# Altium PCB KUOZHAN.PCBDOC (part 16 of 21)
Units mm, origin at the board's own origin, x right, y up, seen from the top; angles counter-clockwise.
Board outline 165.51 x 116.38 mm, 2 copper layers (Top Layer, Bottom Layer); 171 components, 245 nets, 894 pads, 298 vias.
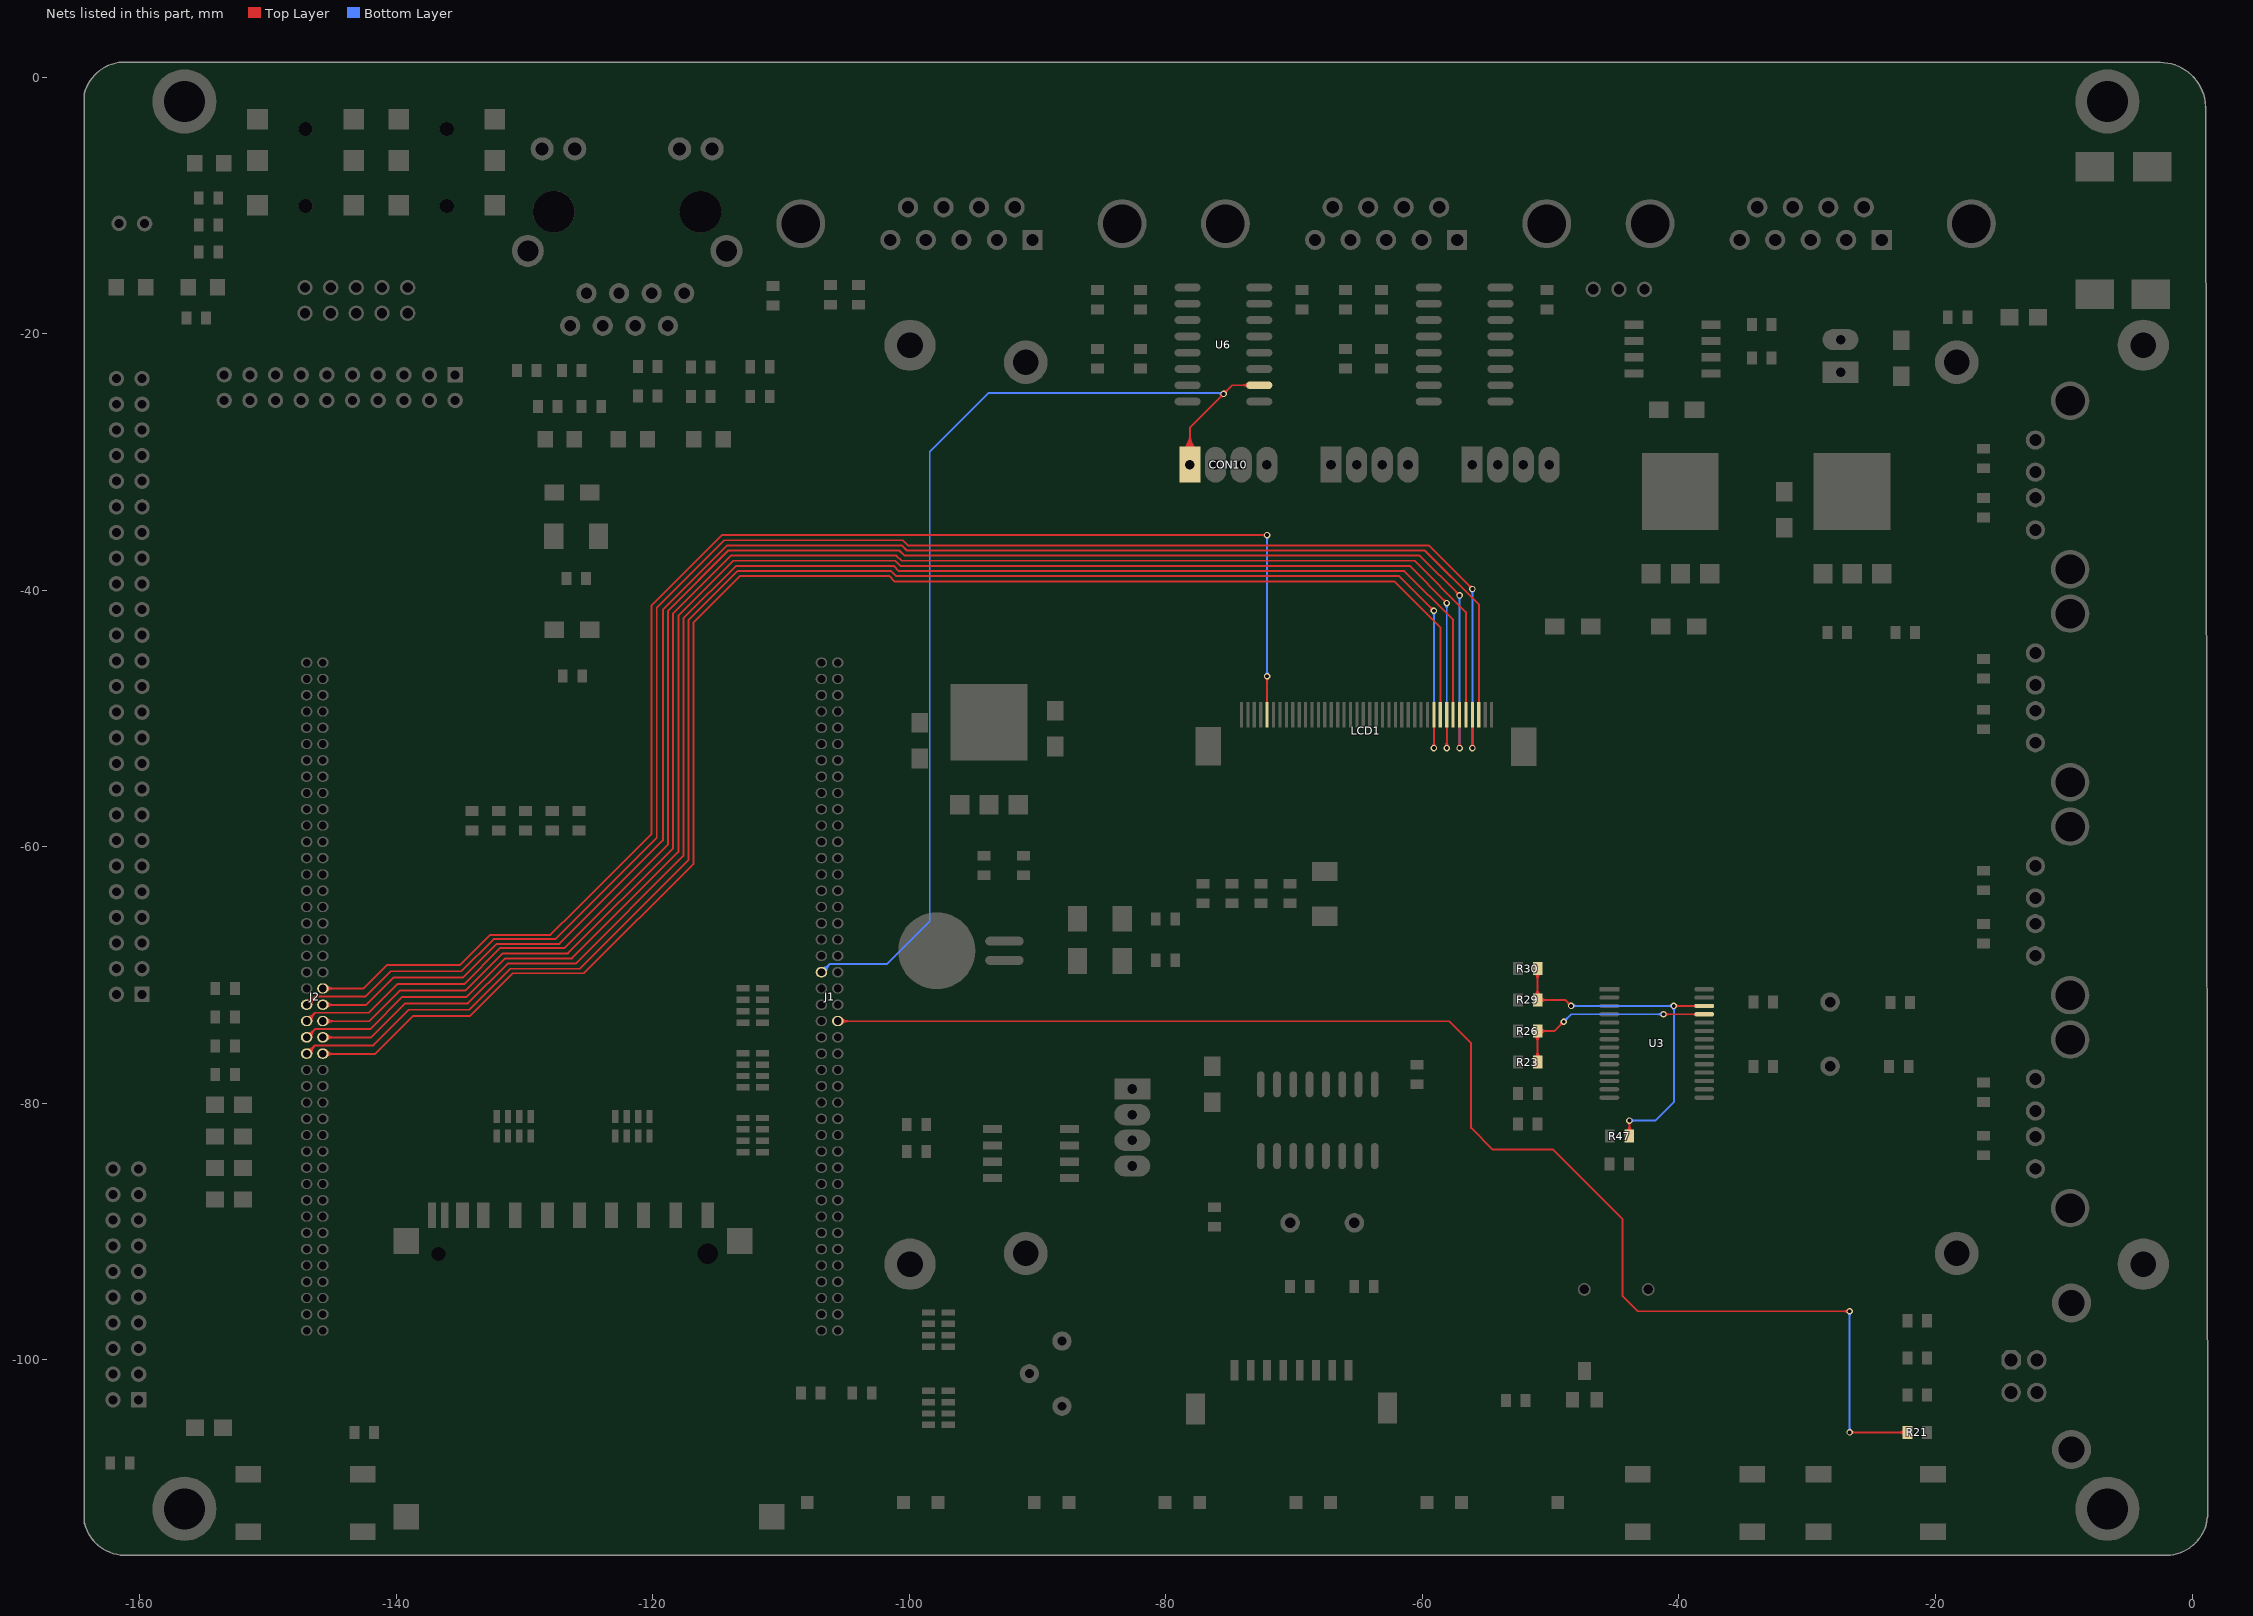
[diagram p16: the nets of this part, all layers, seen from the top]

## Via types
v1: diameter 0.5, hole 0.3, Top Layer to Bottom Layer, 272 vias
v2: diameter 0.6, hole 0.3, Top Layer to Bottom Layer, 24 vias
v3: diameter 0.9, hole 0.9, Top Layer to Bottom Layer, 2 vias

## Nets (pads, with @x,y where several pads share a name; then routed paths per layer and width w, separated by ;. In a path a pad name is that pad's centre, name@x,y a point inside that pad or via, vN(x,y) a via of type N, cw(c..) or ccw(c..) an arc to the next point about the centre after c; other vN are vias at no path point) (continued)
TXD2: CON10.1 J1.39 U6.10 | length 143.2
  Top Layer w0.15: CON10.1@-78.122,-30.21 -78.122,-27.322 v1(-75.488,-24.688) -74.82,-24.02 U6.10@-72.712,-24.02 ; v1@-75.613,-24.688 cw(c-75.914,-24.688) -75.701,-24.901 cw(c-75.488,-25.114) v1@-75.488,-24.813 ; v1@-75.488,-24.563 ccw(c-75.488,-24.261) -75.274,-24.474 ccw(c-75.061,-24.688) v1@-75.363,-24.688 ; CON10.1@-78.652,-29.104 ccw(c-79.934,-27.823) -78.122,-27.823 ; CON10.1@-78.652,-29.104 ccw(c-79.934,-27.823) -78.122,-27.823 ; CON10.1@-78.652,-29.104 ccw(c-79.934,-27.823) -78.122,-27.823 ; CON10.1@-78.652,-29.104 ccw(c-79.934,-27.823) -78.122,-27.823 ; CON10.1@-78.652,-29.104 ccw(c-79.934,-27.823) -78.122,-27.823 ; CON10.1@-78.546,-29.21 ccw(c-79.572,-28.185) -78.122,-28.185 ; CON10.1@-78.546,-29.21 ccw(c-79.572,-28.185) -78.122,-28.185 ; CON10.1@-78.546,-29.21 ccw(c-79.572,-28.185) -78.122,-28.185 ; CON10.1@-78.546,-29.21 ccw(c-79.572,-28.185) -78.122,-28.185 ; CON10.1@-78.546,-29.21 ccw(c-79.572,-28.185) -78.122,-28.185 ; CON10.1@-78.44,-29.317 ccw(c-79.209,-28.547) -78.122,-28.547 ; CON10.1@-78.44,-29.317 ccw(c-79.209,-28.547) -78.122,-28.547 ; CON10.1@-78.44,-29.317 ccw(c-79.209,-28.547) -78.122,-28.547 ; CON10.1@-78.44,-29.317 ccw(c-79.209,-28.547) -78.122,-28.547 ; CON10.1@-78.44,-29.317 ccw(c-79.209,-28.547) -78.122,-28.547 ; -78.122,-28.547 ccw(c-77.034,-28.547) CON10.1@-77.803,-29.317 ; -78.122,-28.547 ccw(c-77.034,-28.547) CON10.1@-77.803,-29.317 ; -78.122,-28.547 ccw(c-77.034,-28.547) CON10.1@-77.803,-29.317 ; -78.122,-28.547 ccw(c-77.034,-28.547) CON10.1@-77.803,-29.317 ; -78.122,-28.547 ccw(c-77.034,-28.547) CON10.1@-77.803,-29.317 ; -78.122,-28.185 ccw(c-76.672,-28.185) CON10.1@-77.697,-29.21 ; -78.122,-28.185 ccw(c-76.672,-28.185) CON10.1@-77.697,-29.21 ; -78.122,-28.185 ccw(c-76.672,-28.185) CON10.1@-77.697,-29.21 ; -78.122,-28.185 ccw(c-76.672,-28.185) CON10.1@-77.697,-29.21 ; -78.122,-28.185 ccw(c-76.672,-28.185) CON10.1@-77.697,-29.21 ; -78.122,-27.823 ccw(c-76.31,-27.823) CON10.1@-77.591,-29.104 ; -78.122,-27.823 ccw(c-76.31,-27.823) CON10.1@-77.591,-29.104 ; -78.122,-27.823 ccw(c-76.31,-27.823) CON10.1@-77.591,-29.104 ; -78.122,-27.823 ccw(c-76.31,-27.823) CON10.1@-77.591,-29.104 ; -78.122,-27.823 ccw(c-76.31,-27.823) CON10.1@-77.591,-29.104 ; -75.786,-24.986 cw(c-75.488,-25.285) v1@-75.488,-24.863 ; -75.786,-24.986 ccw(c-76.085,-24.688) v1@-75.663,-24.688 ; -75.786,-24.986 cw(c-75.488,-25.285) v1@-75.488,-24.863 ; -75.786,-24.986 ccw(c-76.085,-24.688) v1@-75.663,-24.688 ; -75.786,-24.986 cw(c-75.488,-25.285) v1@-75.488,-24.863 ; -75.786,-24.986 ccw(c-76.085,-24.688) v1@-75.663,-24.688 ; -75.786,-24.986 ccw(c-76.085,-24.688) v1@-75.663,-24.688 ; -75.786,-24.986 cw(c-75.488,-25.285) v1@-75.488,-24.863 ; v1@-75.488,-24.513 ccw(c-75.488,-24.09) -75.189,-24.389 ; v1@-75.488,-24.513 ccw(c-75.488,-24.09) -75.189,-24.389 ; v1@-75.488,-24.513 ccw(c-75.488,-24.09) -75.189,-24.389 ; v1@-75.488,-24.513 ccw(c-75.488,-24.09) -75.189,-24.389 ; v1@-75.313,-24.688 cw(c-74.89,-24.688) -75.189,-24.389 ; v1@-75.313,-24.688 cw(c-74.89,-24.688) -75.189,-24.389 ; v1@-75.313,-24.688 cw(c-74.89,-24.688) -75.189,-24.389 ; v1@-75.313,-24.688 cw(c-74.89,-24.688) -75.189,-24.389 ; -73.978,-24.02 cw(c-73.978,-24.575) U6.10@-73.586,-24.182 ; -73.978,-24.02 ccw(c-73.978,-23.465) U6.10@-73.586,-23.858 ; -73.978,-24.02 cw(c-73.978,-24.575) U6.10@-73.586,-24.182 ; -73.978,-24.02 ccw(c-73.978,-23.465) U6.10@-73.586,-23.858 ; -73.978,-24.02 cw(c-73.978,-24.575) U6.10@-73.586,-24.182 ; -73.978,-24.02 ccw(c-73.978,-23.465) U6.10@-73.586,-23.858 ; -73.978,-24.02 cw(c-73.978,-24.575) U6.10@-73.586,-24.182 ; -73.978,-24.02 ccw(c-73.978,-23.465) U6.10@-73.586,-23.858 ; -73.978,-24.02 ccw(c-73.978,-23.465) U6.10@-73.586,-23.858 ; -73.978,-24.02 cw(c-73.978,-24.575) U6.10@-73.586,-24.182
  Bottom Layer w0.15: J1.39@-106.841,-69.785 -106.216,-69.16 ; J1.39@-106.841,-69.769 -106.196,-69.124 -101.724,-69.124 -98.4,-65.8 -98.4,-29.2 -93.812,-24.612 v1@-75.412,-24.612 ; -75.973,-24.612 cw(c-75.973,-25.173) v1@-75.576,-24.776 ; J1.39@-106.841,-69.61 ccw(c-106.841,-69.188) J1.39@-106.542,-69.486 ; J1.39@-106.841,-69.61 ccw(c-106.841,-69.188) J1.39@-106.542,-69.486 ; J1.39@-106.841,-69.61 ccw(c-106.841,-69.188) J1.39@-106.542,-69.486 ; J1.39@-106.841,-69.46 ccw(c-106.841,-68.675) -106.286,-69.23 ; J1.39@-106.841,-69.46 ccw(c-106.841,-68.675) -106.286,-69.23 ; J1.39@-106.841,-69.46 ccw(c-106.841,-68.675) -106.286,-69.23 ; J1.39@-106.791,-69.444 ccw(c-106.791,-68.78) -106.321,-69.25 cw(c-106.791,-68.78) J1.39@-106.791,-69.444 ; J1.39@-106.791,-69.444 ccw(c-106.791,-68.742) -106.294,-69.239 cw(c-106.791,-68.742) J1.39@-106.791,-69.444 ; J1.39@-106.666,-69.785 cw(c-106.243,-69.785) J1.39@-106.542,-69.486 ; J1.39@-106.666,-69.785 cw(c-106.243,-69.785) J1.39@-106.542,-69.486 ; J1.39@-106.666,-69.785 cw(c-106.243,-69.785) J1.39@-106.542,-69.486 ; J1.39@-106.616,-69.769 cw(c-106.073,-69.769) -106.457,-69.385 ccw(c-106.073,-69.769) J1.39@-106.616,-69.769 ; J1.39@-106.616,-69.768 cw(c-106.119,-69.766) -106.47,-69.414 ccw(c-106.119,-69.766) J1.39@-106.616,-69.768 ; J1.39@-106.516,-69.785 cw(c-105.731,-69.785) -106.286,-69.23 ; J1.39@-106.516,-69.785 cw(c-105.731,-69.785) -106.286,-69.23 ; J1.39@-106.516,-69.785 cw(c-105.731,-69.785) -106.286,-69.23 ; -106.216,-69.16 ccw(c-105.612,-69.764) -106.466,-69.768 cw(c-105.612,-69.764) -106.216,-69.16 ; -76.094,-24.612 cw(c-76.094,-25.294) v1@-75.611,-24.811 ; -76.094,-24.612 cw(c-76.094,-25.294) v1@-75.611,-24.811 ; -76.094,-24.612 cw(c-76.094,-25.294) v1@-75.611,-24.811 ; -76.094,-24.612 cw(c-76.094,-25.294) v1@-75.611,-24.811 ; -75.732,-24.612 cw(c-75.732,-24.932) v1@-75.505,-24.705 ; -75.732,-24.612 cw(c-75.732,-24.932) v1@-75.505,-24.705 ; -75.732,-24.612 cw(c-75.732,-24.932) v1@-75.505,-24.705 ; -75.732,-24.612 cw(c-75.732,-24.932) v1@-75.505,-24.705 ; -75.726,-24.612 ccw(c-75.726,-24.449) v1@-75.611,-24.564 ; -75.726,-24.612 ccw(c-75.726,-24.449) v1@-75.611,-24.564 ; -75.726,-24.612 ccw(c-75.726,-24.449) v1@-75.611,-24.564 ; -75.726,-24.612 ccw(c-75.726,-24.449) v1@-75.611,-24.564 ; J1.39@-106.466,-69.769 cw(c-105.56,-69.769) -106.201,-69.129 ccw(c-105.56,-69.769) J1.39@-106.466,-69.769
USB_EN: J1.46 R21.1 | length 136.8
  Top Layer w0.15: J1.46@-105.571,-73.598 -64.702,-73.598 -57.902,-73.598 -56.2,-75.3 -56.2,-81.9 -54.5,-83.6 -49.8,-83.6 -44.4,-89 -44.4,-95 -43.2,-96.2 v1(-26.7,-96.2) ; v1@-26.788,-96.288 ccw(c-27.002,-96.502) -27.002,-96.2 ccw(c-27.002,-95.898) v1@-26.788,-96.112 ; v1(-26.7,-105.64) R21.1@-22.187,-105.64 ; v1@-26.612,-105.729 cw(c-26.398,-105.942) -26.398,-105.64 cw(c-26.398,-105.339) v1@-26.612,-105.552 ; J1.46@-105.447,-73.721 cw(c-105.148,-74.02) J1.46@-105.148,-73.598 ; J1.46@-105.447,-73.721 cw(c-105.148,-74.02) J1.46@-105.148,-73.598 ; J1.46@-105.447,-73.721 cw(c-105.148,-74.02) J1.46@-105.148,-73.598 ; J1.46@-105.447,-73.474 ccw(c-105.148,-73.175) J1.46@-105.148,-73.598 ; J1.46@-105.447,-73.474 ccw(c-105.148,-73.175) J1.46@-105.148,-73.598 ; J1.46@-105.447,-73.474 ccw(c-105.148,-73.175) J1.46@-105.148,-73.598 ; J1.46@-105.341,-73.828 cw(c-104.786,-74.382) -104.786,-73.598 ; J1.46@-105.341,-73.828 cw(c-104.786,-74.382) -104.786,-73.598 ; J1.46@-105.341,-73.828 cw(c-104.786,-74.382) -104.786,-73.598 ; J1.46@-105.341,-73.368 ccw(c-104.786,-72.813) -104.786,-73.598 ; J1.46@-105.341,-73.368 ccw(c-104.786,-72.813) -104.786,-73.598 ; J1.46@-105.341,-73.368 ccw(c-104.786,-72.813) -104.786,-73.598 ; -27.122,-96.2 cw(c-27.122,-96.622) v1@-26.824,-96.324 ; -27.122,-96.2 ccw(c-27.122,-95.778) v1@-26.824,-96.076 ; -27.122,-96.2 cw(c-27.122,-96.622) v1@-26.824,-96.324 ; -27.122,-96.2 ccw(c-27.122,-95.778) v1@-26.824,-96.076 ; -27.122,-96.2 cw(c-27.122,-96.622) v1@-26.824,-96.324 ; -27.122,-96.2 ccw(c-27.122,-95.778) v1@-26.824,-96.076 ; -27.122,-96.2 ccw(c-27.122,-95.778) v1@-26.824,-96.076 ; -27.122,-96.2 cw(c-27.122,-96.622) v1@-26.824,-96.324 ; v1@-26.576,-105.764 cw(c-26.278,-106.063) -26.278,-105.64 ; v1@-26.576,-105.764 cw(c-26.278,-106.063) -26.278,-105.64 ; v1@-26.576,-105.764 cw(c-26.278,-106.063) -26.278,-105.64 ; v1@-26.576,-105.764 cw(c-26.278,-106.063) -26.278,-105.64 ; v1@-26.576,-105.517 ccw(c-26.278,-105.218) -26.278,-105.64 ; v1@-26.576,-105.517 ccw(c-26.278,-105.218) -26.278,-105.64 ; v1@-26.576,-105.517 ccw(c-26.278,-105.218) -26.278,-105.64 ; v1@-26.576,-105.517 ccw(c-26.278,-105.218) -26.278,-105.64 ; -22.926,-105.64 cw(c-22.926,-106.379) R21.1@-22.404,-105.857 ; -22.926,-105.64 ccw(c-22.926,-104.902) R21.1@-22.404,-105.424 ; -22.926,-105.64 cw(c-22.926,-106.379) R21.1@-22.404,-105.857 ; -22.926,-105.64 ccw(c-22.926,-104.902) R21.1@-22.404,-105.424 ; -22.926,-105.64 cw(c-22.926,-106.379) R21.1@-22.404,-105.857 ; -22.926,-105.64 ccw(c-22.926,-104.902) R21.1@-22.404,-105.424 ; -22.926,-105.64 cw(c-22.926,-106.379) R21.1@-22.404,-105.857 ; -22.926,-105.64 ccw(c-22.926,-104.902) R21.1@-22.404,-105.424 ; -22.926,-105.64 ccw(c-22.926,-104.902) R21.1@-22.404,-105.424 ; -22.926,-105.64 cw(c-22.926,-106.379) R21.1@-22.404,-105.857 ; J1.46@-105.397,-73.456 ccw(c-105.054,-73.112) -105.054,-73.598 cw(c-105.054,-73.112) J1.46@-105.397,-73.456 ; J1.46@-105.291,-73.809 cw(c-104.781,-74.32) -104.781,-73.598 ccw(c-104.781,-74.32) J1.46@-105.291,-73.809 ; J1.46@-105.291,-73.35 ccw(c-104.692,-72.75) -104.692,-73.598 cw(c-104.692,-72.75) J1.46@-105.291,-73.35
  Bottom Layer w0.15: v1@-26.788,-105.552 ccw(c-27.002,-105.339) -26.7,-105.339 ccw(c-26.398,-105.339) v1@-26.612,-105.552 ; v1@-26.788,-96.288 cw(c-27.002,-96.502) -26.7,-96.502 cw(c-26.398,-96.502) v1@-26.612,-96.288 ; v1(-26.7,-105.64) v1(-26.7,-96.2) ; v1@-26.824,-105.517 ccw(c-27.122,-105.218) -26.7,-105.218 ; v1@-26.824,-105.517 ccw(c-27.122,-105.218) -26.7,-105.218 ; v1@-26.824,-105.517 ccw(c-27.122,-105.218) -26.7,-105.218 ; v1@-26.824,-105.517 ccw(c-27.122,-105.218) -26.7,-105.218 ; v1@-26.824,-96.324 cw(c-27.122,-96.622) -26.7,-96.622 ; v1@-26.824,-96.324 cw(c-27.122,-96.622) -26.7,-96.622 ; v1@-26.824,-96.324 cw(c-27.122,-96.622) -26.7,-96.622 ; v1@-26.824,-96.324 cw(c-27.122,-96.622) -26.7,-96.622 ; -26.7,-105.218 ccw(c-26.278,-105.218) v1@-26.576,-105.517 ; -26.7,-105.218 ccw(c-26.278,-105.218) v1@-26.576,-105.517 ; -26.7,-105.218 ccw(c-26.278,-105.218) v1@-26.576,-105.517 ; -26.7,-105.218 ccw(c-26.278,-105.218) v1@-26.576,-105.517 ; -26.7,-96.622 cw(c-26.278,-96.622) v1@-26.576,-96.324 ; -26.7,-96.622 cw(c-26.278,-96.622) v1@-26.576,-96.324 ; -26.7,-96.622 cw(c-26.278,-96.622) v1@-26.576,-96.324 ; -26.7,-96.622 cw(c-26.278,-96.622) v1@-26.576,-96.324
USBHUB_D+: R29.1 R30.1 R47.2 U3.26 | length 75.1
  Top Layer w0.15: R30.1@-51.013,-69.5 R29.1@-51.013,-71.928 -48.872,-71.928 v1(-48.4,-72.4) ; v1@-48.525,-72.4 ccw(c-48.827,-72.4) -48.613,-72.187 ccw(c-48.4,-71.973) v1@-48.4,-72.275 ; v1@-43.952,-81.425 cw(c-44.165,-81.638) -43.863,-81.638 cw(c-43.562,-81.638) v1@-43.775,-81.425 ; R47.2@-43.863,-82.54 v1(-43.863,-81.337) ; v1(-40.4,-72.4) U3.26@-38.1,-72.4 ; v1@-40.312,-72.488 cw(c-40.098,-72.702) -40.098,-72.4 cw(c-40.098,-72.098) v1@-40.312,-72.312 ; U3.26@-38.704,-72.464 ccw(c-38.857,-72.617) -38.857,-72.4 ccw(c-38.857,-72.183) U3.26@-38.704,-72.336 ; U3.26@-38.699,-72.464 ccw(c-38.852,-72.617) -38.852,-72.4 ccw(c-38.852,-72.183) U3.26@-38.699,-72.336 ; R29.1@-51.229,-71.585 ccw(c-51.751,-71.063) -51.013,-71.063 ; R29.1@-51.229,-71.585 ccw(c-51.751,-71.063) -51.013,-71.063 ; R29.1@-51.229,-71.585 ccw(c-51.751,-71.063) -51.013,-71.063 ; R29.1@-51.229,-71.585 ccw(c-51.751,-71.063) -51.013,-71.063 ; R29.1@-51.229,-71.585 ccw(c-51.751,-71.063) -51.013,-71.063 ; R30.1@-51.229,-69.843 cw(c-51.751,-70.366) -51.013,-70.366 ; R30.1@-51.229,-69.843 cw(c-51.751,-70.366) -51.013,-70.366 ; R30.1@-51.229,-69.843 cw(c-51.751,-70.366) -51.013,-70.366 ; R30.1@-51.229,-69.843 cw(c-51.751,-70.366) -51.013,-70.366 ; R30.1@-51.229,-69.843 cw(c-51.751,-70.366) -51.013,-70.366 ; -51.013,-71.063 ccw(c-50.274,-71.063) R29.1@-50.796,-71.585 ; -51.013,-71.063 ccw(c-50.274,-71.063) R29.1@-50.796,-71.585 ; -51.013,-71.063 ccw(c-50.274,-71.063) R29.1@-50.796,-71.585 ; -51.013,-71.063 ccw(c-50.274,-71.063) R29.1@-50.796,-71.585 ; -51.013,-71.063 ccw(c-50.274,-71.063) R29.1@-50.796,-71.585 ; -51.013,-70.366 cw(c-50.274,-70.366) R30.1@-50.796,-69.843 ; -51.013,-70.366 cw(c-50.274,-70.366) R30.1@-50.796,-69.843 ; -51.013,-70.366 cw(c-50.274,-70.366) R30.1@-50.796,-69.843 ; -51.013,-70.366 cw(c-50.274,-70.366) R30.1@-50.796,-69.843 ; -51.013,-70.366 cw(c-50.274,-70.366) R30.1@-50.796,-69.843 ; R29.1@-50.796,-72.145 cw(c-50.274,-72.667) -50.274,-71.928 ; R29.1@-50.796,-72.145 cw(c-50.274,-72.667) -50.274,-71.928 ; R29.1@-50.796,-72.145 cw(c-50.274,-72.667) -50.274,-71.928 ; R29.1@-50.796,-72.145 cw(c-50.274,-72.667) -50.274,-71.928 ; R29.1@-50.796,-72.145 cw(c-50.274,-72.667) -50.274,-71.928 ; R29.1@-50.796,-71.712 ccw(c-50.274,-71.19) -50.274,-71.928 ; R29.1@-50.796,-71.712 ccw(c-50.274,-71.19) -50.274,-71.928 ; R29.1@-50.796,-71.712 ccw(c-50.274,-71.19) -50.274,-71.928 ; R29.1@-50.796,-71.712 ccw(c-50.274,-71.19) -50.274,-71.928 ; R29.1@-50.796,-71.712 ccw(c-50.274,-71.19) -50.274,-71.928 ; -48.699,-72.101 cw(c-48.997,-72.4) v1@-48.575,-72.4 ; -48.699,-72.101 ccw(c-48.4,-71.803) v1@-48.4,-72.225 ; -48.699,-72.101 cw(c-48.997,-72.4) v1@-48.575,-72.4 ; -48.699,-72.101 ccw(c-48.4,-71.803) v1@-48.4,-72.225 ; -48.699,-72.101 cw(c-48.997,-72.4) v1@-48.575,-72.4 ; -48.699,-72.101 ccw(c-48.4,-71.803) v1@-48.4,-72.225 ; -48.699,-72.101 ccw(c-48.4,-71.803) v1@-48.4,-72.225 ; -48.699,-72.101 cw(c-48.997,-72.4) v1@-48.575,-72.4 ; R47.2@-44.08,-82.197 ccw(c-44.602,-81.675) -43.863,-81.675 ; R47.2@-44.08,-82.197 ccw(c-44.602,-81.675) -43.863,-81.675 ; R47.2@-44.08,-82.197 ccw(c-44.602,-81.675) -43.863,-81.675 ; R47.2@-44.08,-82.197 ccw(c-44.602,-81.675) -43.863,-81.675 ; R47.2@-44.08,-82.197 ccw(c-44.602,-81.675) -43.863,-81.675 ; v1@-43.987,-81.46 cw(c-44.286,-81.759) -43.863,-81.759 ; v1@-43.987,-81.46 cw(c-44.286,-81.759) -43.863,-81.759 ; v1@-43.987,-81.46 cw(c-44.286,-81.759) -43.863,-81.759 ; v1@-43.987,-81.46 cw(c-44.286,-81.759) -43.863,-81.759 ; -43.863,-81.759 cw(c-43.441,-81.759) v1@-43.74,-81.46 ; -43.863,-81.759 cw(c-43.441,-81.759) v1@-43.74,-81.46 ; -43.863,-81.759 cw(c-43.441,-81.759) v1@-43.74,-81.46 ; -43.863,-81.759 cw(c-43.441,-81.759) v1@-43.74,-81.46 ; -43.863,-81.675 ccw(c-43.125,-81.675) R47.2@-43.647,-82.197 ; -43.863,-81.675 ccw(c-43.125,-81.675) R47.2@-43.647,-82.197 ; -43.863,-81.675 ccw(c-43.125,-81.675) R47.2@-43.647,-82.197 ; -43.863,-81.675 ccw(c-43.125,-81.675) R47.2@-43.647,-82.197 ; -43.863,-81.675 ccw(c-43.125,-81.675) R47.2@-43.647,-82.197 ; v1@-40.276,-72.524 cw(c-39.978,-72.822) -39.978,-72.4 ; v1@-40.276,-72.524 cw(c-39.978,-72.822) -39.978,-72.4 ; v1@-40.276,-72.524 cw(c-39.978,-72.822) -39.978,-72.4 ; v1@-40.276,-72.524 cw(c-39.978,-72.822) -39.978,-72.4 ; v1@-40.276,-72.276 ccw(c-39.978,-71.978) -39.978,-72.4 ; v1@-40.276,-72.276 ccw(c-39.978,-71.978) -39.978,-72.4 ; v1@-40.276,-72.276 ccw(c-39.978,-71.978) -39.978,-72.4 ; v1@-40.276,-72.276 ccw(c-39.978,-71.978) -39.978,-72.4 ; -38.802,-72.4 cw(c-38.802,-72.617) U3.26@-38.649,-72.464 ; -38.802,-72.4 ccw(c-38.802,-72.183) U3.26@-38.649,-72.336 ; -38.802,-72.4 cw(c-38.802,-72.617) U3.26@-38.649,-72.464 ; -38.802,-72.4 ccw(c-38.802,-72.183) U3.26@-38.649,-72.336 ; -38.802,-72.4 cw(c-38.802,-72.617) U3.26@-38.649,-72.464 ; -38.802,-72.4 ccw(c-38.802,-72.183) U3.26@-38.649,-72.336
  Bottom Layer w0.15: v1(-48.4,-72.4) v1(-40.4,-72.4) -40.4,-79.9 -41.837,-81.337 v1(-43.863,-81.337) ; v1@-48.312,-72.488 cw(c-48.098,-72.702) -48.098,-72.4 cw(c-48.098,-72.098) v1@-48.312,-72.312 ; v1@-43.775,-81.425 cw(c-43.562,-81.638) -43.562,-81.337 cw(c-43.562,-81.035) v1@-43.775,-81.248 ; v1@-40.488,-72.312 cw(c-40.702,-72.098) -40.702,-72.4 cw(c-40.702,-72.702) -40.488,-72.488 cw(c-40.702,-72.702) -40.4,-72.702 cw(c-40.098,-72.702) v1@-40.312,-72.488 ; v1@-48.276,-72.524 cw(c-47.978,-72.822) -47.978,-72.4 ; v1@-48.276,-72.524 cw(c-47.978,-72.822) -47.978,-72.4 ; v1@-48.276,-72.524 cw(c-47.978,-72.822) -47.978,-72.4 ; v1@-48.276,-72.524 cw(c-47.978,-72.822) -47.978,-72.4 ; v1@-48.276,-72.276 ccw(c-47.978,-71.978) -47.978,-72.4 ; v1@-48.276,-72.276 ccw(c-47.978,-71.978) -47.978,-72.4 ; v1@-48.276,-72.276 ccw(c-47.978,-71.978) -47.978,-72.4 ; v1@-48.276,-72.276 ccw(c-47.978,-71.978) -47.978,-72.4 ; v1@-43.74,-81.46 cw(c-43.441,-81.759) -43.441,-81.337 ; v1@-43.74,-81.46 cw(c-43.441,-81.759) -43.441,-81.337 ; v1@-43.74,-81.46 cw(c-43.441,-81.759) -43.441,-81.337 ; v1@-43.74,-81.46 cw(c-43.441,-81.759) -43.441,-81.337 ; v1@-43.74,-81.213 ccw(c-43.441,-80.914) -43.441,-81.337 ; v1@-43.74,-81.213 ccw(c-43.441,-80.914) -43.441,-81.337 ; v1@-43.74,-81.213 ccw(c-43.441,-80.914) -43.441,-81.337 ; v1@-43.74,-81.213 ccw(c-43.441,-80.914) -43.441,-81.337 ; -40.822,-72.4 cw(c-40.822,-72.822) v1@-40.524,-72.524 ; -40.822,-72.4 ccw(c-40.822,-71.978) v1@-40.524,-72.276 ; -40.822,-72.4 cw(c-40.822,-72.822) v1@-40.524,-72.524 ; -40.822,-72.4 ccw(c-40.822,-71.978) v1@-40.524,-72.276 ; -40.822,-72.4 cw(c-40.822,-72.822) v1@-40.524,-72.524 ; -40.822,-72.4 ccw(c-40.822,-71.978) v1@-40.524,-72.276 ; -40.822,-72.4 ccw(c-40.822,-71.978) v1@-40.524,-72.276 ; -40.822,-72.4 cw(c-40.822,-72.822) v1@-40.524,-72.524 ; v1@-40.524,-72.524 cw(c-40.822,-72.822) -40.4,-72.822 ; v1@-40.524,-72.524 cw(c-40.822,-72.822) -40.4,-72.822 ; v1@-40.524,-72.524 cw(c-40.822,-72.822) -40.4,-72.822 ; v1@-40.524,-72.524 cw(c-40.822,-72.822) -40.4,-72.822 ; -40.4,-72.822 cw(c-39.978,-72.822) v1@-40.276,-72.524 ; -40.4,-72.822 cw(c-39.978,-72.822) v1@-40.276,-72.524 ; -40.4,-72.822 cw(c-39.978,-72.822) v1@-40.276,-72.524 ; -40.4,-72.822 cw(c-39.978,-72.822) v1@-40.276,-72.524
USBHUB_D-: R23.1 R26.1 U3.25 | length 47.5
  Top Layer w0.15: R23.1@-51.013,-76.785 R26.1@-51.013,-74.357 -49.707,-74.357 v1(-48.983,-73.633) ; v1@-49.108,-73.633 cw(c-49.41,-73.633) -49.197,-73.847 cw(c-48.983,-74.06) v1@-48.983,-73.758 ; v1(-41.2,-73.05) U3.25@-38.1,-73.05 ; v1@-41.112,-73.138 cw(c-40.898,-73.352) -40.898,-73.05 cw(c-40.898,-72.748) v1@-41.112,-72.962 ; U3.25@-38.704,-73.114 ccw(c-38.857,-73.267) -38.857,-73.05 ccw(c-38.857,-72.833) U3.25@-38.704,-72.986 ; U3.25@-38.699,-73.114 ccw(c-38.852,-73.267) -38.852,-73.05 ccw(c-38.852,-72.833) U3.25@-38.699,-72.986 ; R23.1@-51.229,-76.441 ccw(c-51.751,-75.919) -51.013,-75.919 ; R23.1@-51.229,-76.441 ccw(c-51.751,-75.919) -51.013,-75.919 ; R23.1@-51.229,-76.441 ccw(c-51.751,-75.919) -51.013,-75.919 ; R23.1@-51.229,-76.441 ccw(c-51.751,-75.919) -51.013,-75.919 ; R23.1@-51.229,-76.441 ccw(c-51.751,-75.919) -51.013,-75.919 ; R26.1@-51.229,-74.7 cw(c-51.751,-75.222) -51.013,-75.222 ; R26.1@-51.229,-74.7 cw(c-51.751,-75.222) -51.013,-75.222 ; R26.1@-51.229,-74.7 cw(c-51.751,-75.222) -51.013,-75.222 ; R26.1@-51.229,-74.7 cw(c-51.751,-75.222) -51.013,-75.222 ; R26.1@-51.229,-74.7 cw(c-51.751,-75.222) -51.013,-75.222 ; -51.013,-75.919 ccw(c-50.274,-75.919) R23.1@-50.796,-76.441 ; -51.013,-75.919 ccw(c-50.274,-75.919) R23.1@-50.796,-76.441 ; -51.013,-75.919 ccw(c-50.274,-75.919) R23.1@-50.796,-76.441 ; -51.013,-75.919 ccw(c-50.274,-75.919) R23.1@-50.796,-76.441 ; -51.013,-75.919 ccw(c-50.274,-75.919) R23.1@-50.796,-76.441 ; -51.013,-75.222 cw(c-50.274,-75.222) R26.1@-50.796,-74.7 ; -51.013,-75.222 cw(c-50.274,-75.222) R26.1@-50.796,-74.7 ; -51.013,-75.222 cw(c-50.274,-75.222) R26.1@-50.796,-74.7 ; -51.013,-75.222 cw(c-50.274,-75.222) R26.1@-50.796,-74.7 ; -51.013,-75.222 cw(c-50.274,-75.222) R26.1@-50.796,-74.7 ; R26.1@-50.796,-74.573 cw(c-50.274,-75.095) -50.274,-74.357 ; R26.1@-50.796,-74.573 cw(c-50.274,-75.095) -50.274,-74.357 ; R26.1@-50.796,-74.573 cw(c-50.274,-75.095) -50.274,-74.357 ; R26.1@-50.796,-74.573 cw(c-50.274,-75.095) -50.274,-74.357 ; R26.1@-50.796,-74.573 cw(c-50.274,-75.095) -50.274,-74.357 ; R26.1@-50.796,-74.14 ccw(c-50.274,-73.618) -50.274,-74.357 ; R26.1@-50.796,-74.14 ccw(c-50.274,-73.618) -50.274,-74.357 ; R26.1@-50.796,-74.14 ccw(c-50.274,-73.618) -50.274,-74.357 ; R26.1@-50.796,-74.14 ccw(c-50.274,-73.618) -50.274,-74.357 ; R26.1@-50.796,-74.14 ccw(c-50.274,-73.618) -50.274,-74.357 ; -49.282,-73.932 cw(c-48.983,-74.231) v1@-48.983,-73.808 ; -49.282,-73.932 ccw(c-49.581,-73.633) v1@-49.158,-73.633 ; -49.282,-73.932 cw(c-48.983,-74.231) v1@-48.983,-73.808 ; -49.282,-73.932 ccw(c-49.581,-73.633) v1@-49.158,-73.633 ; -49.282,-73.932 cw(c-48.983,-74.231) v1@-48.983,-73.808 ; -49.282,-73.932 ccw(c-49.581,-73.633) v1@-49.158,-73.633 ; -49.282,-73.932 ccw(c-49.581,-73.633) v1@-49.158,-73.633 ; -49.282,-73.932 cw(c-48.983,-74.231) v1@-48.983,-73.808 ; v1@-41.076,-73.174 cw(c-40.778,-73.472) -40.778,-73.05 ; v1@-41.076,-73.174 cw(c-40.778,-73.472) -40.778,-73.05 ; v1@-41.076,-73.174 cw(c-40.778,-73.472) -40.778,-73.05 ; v1@-41.076,-73.174 cw(c-40.778,-73.472) -40.778,-73.05 ; v1@-41.076,-72.926 ccw(c-40.778,-72.628) -40.778,-73.05 ; v1@-41.076,-72.926 ccw(c-40.778,-72.628) -40.778,-73.05 ; v1@-41.076,-72.926 ccw(c-40.778,-72.628) -40.778,-73.05 ; v1@-41.076,-72.926 ccw(c-40.778,-72.628) -40.778,-73.05 ; -38.802,-73.05 cw(c-38.802,-73.267) U3.25@-38.649,-73.114 ; -38.802,-73.05 ccw(c-38.802,-72.833) U3.25@-38.649,-72.986 ; -38.802,-73.05 cw(c-38.802,-73.267) U3.25@-38.649,-73.114 ; -38.802,-73.05 ccw(c-38.802,-72.833) U3.25@-38.649,-72.986 ; -38.802,-73.05 cw(c-38.802,-73.267) U3.25@-38.649,-73.114 ; -38.802,-73.05 ccw(c-38.802,-72.833) U3.25@-38.649,-72.986
  Bottom Layer w0.15: v1(-48.983,-73.633) -48.4,-73.05 v1(-41.2,-73.05) ; v1@-48.983,-73.508 ccw(c-48.983,-73.206) -48.77,-73.42 ccw(c-48.556,-73.633) v1@-48.858,-73.633 ; v1@-41.288,-73.138 ccw(c-41.502,-73.352) -41.502,-73.05 ccw(c-41.502,-72.748) v1@-41.288,-72.962 ; v1@-48.983,-73.458 ccw(c-48.983,-73.036) -48.684,-73.334 ; v1@-48.983,-73.458 ccw(c-48.983,-73.036) -48.684,-73.334 ; v1@-48.983,-73.458 ccw(c-48.983,-73.036) -48.684,-73.334 ; v1@-48.983,-73.458 ccw(c-48.983,-73.036) -48.684,-73.334 ; v1@-48.808,-73.633 cw(c-48.386,-73.633) -48.684,-73.334 ; v1@-48.808,-73.633 cw(c-48.386,-73.633) -48.684,-73.334 ; v1@-48.808,-73.633 cw(c-48.386,-73.633) -48.684,-73.334 ; v1@-48.808,-73.633 cw(c-48.386,-73.633) -48.684,-73.334 ; -41.622,-73.05 cw(c-41.622,-73.472) v1@-41.324,-73.174 ; -41.622,-73.05 ccw(c-41.622,-72.628) v1@-41.324,-72.926 ; -41.622,-73.05 cw(c-41.622,-73.472) v1@-41.324,-73.174 ; -41.622,-73.05 ccw(c-41.622,-72.628) v1@-41.324,-72.926 ; -41.622,-73.05 cw(c-41.622,-73.472) v1@-41.324,-73.174 ; -41.622,-73.05 ccw(c-41.622,-72.628) v1@-41.324,-72.926 ; -41.622,-73.05 ccw(c-41.622,-72.628) v1@-41.324,-72.926 ; -41.622,-73.05 cw(c-41.622,-73.472) v1@-41.324,-73.174
VCLK: J2.42 LCD1.36 | length 134.1
  Top Layer w0.15: J2.42@-145.703,-71.056 -142.556,-71.056 -140.7,-69.2 -135,-69.2 -132.672,-66.872 -127.972,-66.872 -125.969,-64.869 -120.1,-59 -120.1,-41.2 -114.6,-35.7 v1(-72.1,-35.7) ; v1@-72.188,-46.788 cw(c-72.402,-47.002) -72.1,-47.002 cw(c-71.798,-47.002) v1@-72.012,-46.788 ; v1@-72.188,-35.788 ccw(c-72.402,-36.002) -72.402,-35.7 ccw(c-72.402,-35.398) v1@-72.188,-35.612 ; LCD1.36@-72.1,-49.7 v1(-72.1,-46.7) ; J2.42@-145.579,-71.18 cw(c-145.28,-71.478) J2.42@-145.28,-71.056 ; J2.42@-145.579,-71.18 cw(c-145.28,-71.478) J2.42@-145.28,-71.056 ; J2.42@-145.579,-71.18 cw(c-145.28,-71.478) J2.42@-145.28,-71.056 ; J2.42@-145.579,-70.932 ccw(c-145.28,-70.633) J2.42@-145.28,-71.056 ; J2.42@-145.579,-70.932 ccw(c-145.28,-70.633) J2.42@-145.28,-71.056 ; J2.42@-145.579,-70.932 ccw(c-145.28,-70.633) J2.42@-145.28,-71.056 ; J2.42@-145.473,-71.286 cw(c-144.918,-71.841) -144.918,-71.056 ; J2.42@-145.473,-71.286 cw(c-144.918,-71.841) -144.918,-71.056 ; J2.42@-145.473,-71.286 cw(c-144.918,-71.841) -144.918,-71.056 ; J2.42@-145.473,-70.826 ccw(c-144.918,-70.271) -144.918,-71.056 ; J2.42@-145.473,-70.826 ccw(c-144.918,-70.271) -144.918,-71.056 ; J2.42@-145.473,-70.826 ccw(c-144.918,-70.271) -144.918,-71.056 ; -72.522,-35.7 cw(c-72.522,-36.122) v1@-72.224,-35.824 ; -72.522,-35.7 ccw(c-72.522,-35.278) v1@-72.224,-35.576 ; -72.522,-35.7 cw(c-72.522,-36.122) v1@-72.224,-35.824 ; -72.522,-35.7 ccw(c-72.522,-35.278) v1@-72.224,-35.576 ; -72.522,-35.7 cw(c-72.522,-36.122) v1@-72.224,-35.824 ; -72.522,-35.7 ccw(c-72.522,-35.278) v1@-72.224,-35.576 ; -72.522,-35.7 ccw(c-72.522,-35.278) v1@-72.224,-35.576 ; -72.522,-35.7 cw(c-72.522,-36.122) v1@-72.224,-35.824 ; v1@-72.224,-46.824 cw(c-72.522,-47.122) -72.1,-47.122 ; v1@-72.224,-46.824 cw(c-72.522,-47.122) -72.1,-47.122 ; v1@-72.224,-46.824 cw(c-72.522,-47.122) -72.1,-47.122 ; v1@-72.224,-46.824 cw(c-72.522,-47.122) -72.1,-47.122 ; -72.1,-47.122 cw(c-71.678,-47.122) v1@-71.976,-46.824 ; -72.1,-47.122 cw(c-71.678,-47.122) v1@-71.976,-46.824 ; -72.1,-47.122 cw(c-71.678,-47.122) v1@-71.976,-46.824 ; -72.1,-47.122 cw(c-71.678,-47.122) v1@-71.976,-46.824 ; J2.42@-145.529,-70.916 ccw(c-145.19,-70.577) -145.19,-71.056 cw(c-145.19,-70.577) J2.42@-145.529,-70.916 ; J2.42@-145.423,-71.269 cw(c-144.908,-71.784) -144.908,-71.056 ccw(c-144.908,-71.784) J2.42@-145.423,-71.269 ; J2.42@-145.423,-70.81 ccw(c-144.828,-70.215) -144.828,-71.056 cw(c-144.828,-70.215) J2.42@-145.423,-70.81
  Bottom Layer w0.15: v1@-72.188,-46.612 ccw(c-72.402,-46.398) -72.1,-46.398 ccw(c-71.798,-46.398) v1@-72.012,-46.612 ; v1@-72.188,-35.788 cw(c-72.402,-36.002) -72.1,-36.002 cw(c-71.798,-36.002) v1@-72.012,-35.788 ; v1(-72.1,-46.7) v1(-72.1,-35.7) ; v1@-72.224,-46.576 ccw(c-72.522,-46.278) -72.1,-46.278 ; v1@-72.224,-46.576 ccw(c-72.522,-46.278) -72.1,-46.278 ; v1@-72.224,-46.576 ccw(c-72.522,-46.278) -72.1,-46.278 ; v1@-72.224,-46.576 ccw(c-72.522,-46.278) -72.1,-46.278 ; v1@-72.224,-35.824 cw(c-72.522,-36.122) -72.1,-36.122 ; v1@-72.224,-35.824 cw(c-72.522,-36.122) -72.1,-36.122 ; v1@-72.224,-35.824 cw(c-72.522,-36.122) -72.1,-36.122 ; v1@-72.224,-35.824 cw(c-72.522,-36.122) -72.1,-36.122 ; -72.1,-46.278 ccw(c-71.678,-46.278) v1@-71.976,-46.576 ; -72.1,-46.278 ccw(c-71.678,-46.278) v1@-71.976,-46.576 ; -72.1,-46.278 ccw(c-71.678,-46.278) v1@-71.976,-46.576 ; -72.1,-46.278 ccw(c-71.678,-46.278) v1@-71.976,-46.576 ; -72.1,-36.122 cw(c-71.678,-36.122) v1@-71.976,-35.824 ; -72.1,-36.122 cw(c-71.678,-36.122) v1@-71.976,-35.824 ; -72.1,-36.122 cw(c-71.678,-36.122) v1@-71.976,-35.824 ; -72.1,-36.122 cw(c-71.678,-36.122) v1@-71.976,-35.824
VD0: J2.44 LCD1.3 | length 134.9
  Top Layer w0.15: J2.44@-145.703,-72.327 -142.327,-72.327 -140.2,-70.2 -134.8,-70.2 -132.164,-67.564 -127.264,-67.564 -119.2,-59.5 -119.2,-41.5 -114.2,-36.5 -100.6,-36.5 -100.2,-36.9 -70.6,-36.9 -59.8,-36.9 -55.6,-41.1 LCD1.3@-55.6,-49.7 ; J2.44@-145.579,-72.451 cw(c-145.28,-72.749) J2.44@-145.28,-72.327 ; J2.44@-145.579,-72.451 cw(c-145.28,-72.749) J2.44@-145.28,-72.327 ; J2.44@-145.579,-72.451 cw(c-145.28,-72.749) J2.44@-145.28,-72.327 ; J2.44@-145.579,-72.203 ccw(c-145.28,-71.904) J2.44@-145.28,-72.327 ; J2.44@-145.579,-72.203 ccw(c-145.28,-71.904) J2.44@-145.28,-72.327 ; J2.44@-145.579,-72.203 ccw(c-145.28,-71.904) J2.44@-145.28,-72.327 ; J2.44@-145.473,-72.557 cw(c-144.918,-73.111) -144.918,-72.327 ; J2.44@-145.473,-72.557 cw(c-144.918,-73.111) -144.918,-72.327 ; J2.44@-145.473,-72.557 cw(c-144.918,-73.111) -144.918,-72.327 ; J2.44@-145.473,-72.097 ccw(c-144.918,-71.542) -144.918,-72.327 ; J2.44@-145.473,-72.097 ccw(c-144.918,-71.542) -144.918,-72.327 ; J2.44@-145.473,-72.097 ccw(c-144.918,-71.542) -144.918,-72.327 ; J2.44@-145.529,-72.186 ccw(c-145.188,-71.845) -145.188,-72.327 cw(c-145.188,-71.845) J2.44@-145.529,-72.186 ; J2.44@-145.423,-72.539 cw(c-144.91,-73.052) -144.91,-72.327 ccw(c-144.91,-73.052) J2.44@-145.423,-72.539 ; J2.44@-145.423,-72.08 ccw(c-144.826,-71.482) -144.826,-72.327 cw(c-144.826,-71.482) J2.44@-145.423,-72.08
VD1: J2.43 LCD1.4 | length 158.6
  Top Layer w0.15: J2.43@-146.973,-72.327 -146.348,-71.702 ; J2.43@-146.973,-72.309 -146.328,-71.664 -142.364,-71.664 -140.4,-69.7 -134.9,-69.7 -132.4,-67.2 -127.6,-67.2 -119.677,-59.277 -119.677,-41.377 -114.4,-36.1 -100.5,-36.1 -100.1,-36.5 -59.5,-36.5 v1(-56.1,-39.9) ; v1@-56.225,-39.9 ccw(c-56.527,-39.9) -56.313,-39.687 ccw(c-56.1,-39.473) v1@-56.1,-39.775 ; v1@-56.188,-52.212 ccw(c-56.402,-51.998) -56.1,-51.998 ccw(c-55.798,-51.998) v1@-56.012,-52.212 ; v1(-56.1,-52.3) LCD1.4@-56.1,-49.7 ; J2.43@-146.973,-72.152 ccw(c-146.973,-71.729) J2.43@-146.674,-72.028 ; J2.43@-146.973,-72.152 ccw(c-146.973,-71.729) J2.43@-146.674,-72.028 ; J2.43@-146.973,-72.152 ccw(c-146.973,-71.729) J2.43@-146.674,-72.028 ; J2.43@-146.973,-72.002 ccw(c-146.973,-71.217) -146.418,-71.772 ; J2.43@-146.973,-72.002 ccw(c-146.973,-71.217) -146.418,-71.772 ; J2.43@-146.973,-72.002 ccw(c-146.973,-71.217) -146.418,-71.772 ; J2.43@-146.923,-71.984 ccw(c-146.923,-71.278) -146.423,-71.778 cw(c-146.923,-71.278) J2.43@-146.923,-71.984 ; J2.43@-146.923,-71.984 ccw(c-146.923,-71.32) -146.453,-71.79 cw(c-146.923,-71.32) J2.43@-146.923,-71.984 ; J2.43@-146.798,-72.327 cw(c-146.375,-72.327) J2.43@-146.674,-72.028 ; J2.43@-146.798,-72.327 cw(c-146.375,-72.327) J2.43@-146.674,-72.028 ; J2.43@-146.798,-72.327 cw(c-146.375,-72.327) J2.43@-146.674,-72.028 ; J2.43@-146.748,-72.309 cw(c-146.252,-72.307) -146.603,-71.957 ccw(c-146.252,-72.307) J2.43@-146.748,-72.309 ; J2.43@-146.748,-72.309 cw(c-146.205,-72.309) -146.589,-71.925 ccw(c-146.205,-72.309) J2.43@-146.748,-72.309 ; J2.43@-146.648,-72.327 cw(c-145.863,-72.327) -146.418,-71.772 ; J2.43@-146.648,-72.327 cw(c-145.863,-72.327) -146.418,-71.772 ; J2.43@-146.648,-72.327 cw(c-145.863,-72.327) -146.418,-71.772 ; -146.348,-71.702 ccw(c-145.744,-72.305) -146.598,-72.308 cw(c-145.744,-72.305) -146.348,-71.702 ; -56.399,-39.601 cw(c-56.697,-39.9) v1@-56.275,-39.9 ; -56.399,-39.601 ccw(c-56.1,-39.303) v1@-56.1,-39.725 ; -56.399,-39.601 cw(c-56.697,-39.9) v1@-56.275,-39.9 ; -56.399,-39.601 ccw(c-56.1,-39.303) v1@-56.1,-39.725 ; -56.399,-39.601 cw(c-56.697,-39.9) v1@-56.275,-39.9 ; -56.399,-39.601 ccw(c-56.1,-39.303) v1@-56.1,-39.725 ; -56.399,-39.601 ccw(c-56.1,-39.303) v1@-56.1,-39.725 ; -56.399,-39.601 cw(c-56.697,-39.9) v1@-56.275,-39.9 ; v1@-56.224,-52.176 ccw(c-56.522,-51.878) -56.1,-51.878 ; v1@-56.224,-52.176 ccw(c-56.522,-51.878) -56.1,-51.878 ; v1@-56.224,-52.176 ccw(c-56.522,-51.878) -56.1,-51.878 ; v1@-56.224,-52.176 ccw(c-56.522,-51.878) -56.1,-51.878 ; -56.1,-51.878 ccw(c-55.678,-51.878) v1@-55.976,-52.176 ; -56.1,-51.878 ccw(c-55.678,-51.878) v1@-55.976,-52.176 ; -56.1,-51.878 ccw(c-55.678,-51.878) v1@-55.976,-52.176 ; -56.1,-51.878 ccw(c-55.678,-51.878) v1@-55.976,-52.176 ; J2.43@-146.598,-72.309 cw(c-145.692,-72.309) -146.333,-71.669 ccw(c-145.692,-72.309) J2.43@-146.598,-72.309
  Bottom Layer w0.15: v1@-56.188,-52.212 ccw(c-56.402,-51.998) -56.1,-51.998 ccw(c-55.798,-51.998) v1@-56.012,-52.212 ; v1@-56.188,-39.988 cw(c-56.402,-40.202) -56.1,-40.202 cw(c-55.798,-40.202) v1@-56.012,-39.988 ; v1(-56.1,-52.3) v1(-56.1,-39.9) ; v1@-56.224,-52.176 ccw(c-56.522,-51.878) -56.1,-51.878 ; v1@-56.224,-52.176 ccw(c-56.522,-51.878) -56.1,-51.878 ; v1@-56.224,-52.176 ccw(c-56.522,-51.878) -56.1,-51.878 ; v1@-56.224,-52.176 ccw(c-56.522,-51.878) -56.1,-51.878 ; v1@-56.224,-40.024 cw(c-56.522,-40.322) -56.1,-40.322 ; v1@-56.224,-40.024 cw(c-56.522,-40.322) -56.1,-40.322 ; v1@-56.224,-40.024 cw(c-56.522,-40.322) -56.1,-40.322 ; v1@-56.224,-40.024 cw(c-56.522,-40.322) -56.1,-40.322 ; -56.1,-51.878 ccw(c-55.678,-51.878) v1@-55.976,-52.176 ; -56.1,-51.878 ccw(c-55.678,-51.878) v1@-55.976,-52.176 ; -56.1,-51.878 ccw(c-55.678,-51.878) v1@-55.976,-52.176 ; -56.1,-51.878 ccw(c-55.678,-51.878) v1@-55.976,-52.176 ; -56.1,-40.322 cw(c-55.678,-40.322) v1@-55.976,-40.024 ; -56.1,-40.322 cw(c-55.678,-40.322) v1@-55.976,-40.024 ; -56.1,-40.322 cw(c-55.678,-40.322) v1@-55.976,-40.024 ; -56.1,-40.322 cw(c-55.678,-40.322) v1@-55.976,-40.024
VD2: J2.46 LCD1.5 | length 133.6
  Top Layer w0.15: J2.46@-145.703,-73.598 -142.098,-73.598 -139.7,-71.2 -134.6,-71.2 -131.7,-68.3 -126.6,-68.3 -118.4,-60.1 -118.4,-41.8 -113.9,-37.3 -101,-37.3 -100.6,-37.7 -71.024,-37.7 -67.673,-37.7 -60.6,-37.7 -56.6,-41.7 LCD1.5@-56.6,-49.7 ; J2.46@-145.579,-73.721 cw(c-145.28,-74.02) J2.46@-145.28,-73.598 ; J2.46@-145.579,-73.721 cw(c-145.28,-74.02) J2.46@-145.28,-73.598 ; J2.46@-145.579,-73.721 cw(c-145.28,-74.02) J2.46@-145.28,-73.598 ; J2.46@-145.579,-73.474 ccw(c-145.28,-73.175) J2.46@-145.28,-73.598 ; J2.46@-145.579,-73.474 ccw(c-145.28,-73.175) J2.46@-145.28,-73.598 ; J2.46@-145.579,-73.474 ccw(c-145.28,-73.175) J2.46@-145.28,-73.598 ; J2.46@-145.473,-73.828 cw(c-144.918,-74.382) -144.918,-73.598 ; J2.46@-145.473,-73.828 cw(c-144.918,-74.382) -144.918,-73.598 ; J2.46@-145.473,-73.828 cw(c-144.918,-74.382) -144.918,-73.598 ; J2.46@-145.473,-73.368 ccw(c-144.918,-72.813) -144.918,-73.598 ; J2.46@-145.473,-73.368 ccw(c-144.918,-72.813) -144.918,-73.598 ; J2.46@-145.473,-73.368 ccw(c-144.918,-72.813) -144.918,-73.598 ; J2.46@-145.529,-73.456 ccw(c-145.186,-73.112) -145.186,-73.598 cw(c-145.186,-73.112) J2.46@-145.529,-73.456 ; J2.46@-145.423,-73.809 cw(c-144.913,-74.32) -144.913,-73.598 ccw(c-144.913,-74.32) J2.46@-145.423,-73.809 ; J2.46@-145.423,-73.35 ccw(c-144.824,-72.75) -144.824,-73.598 cw(c-144.824,-72.75) J2.46@-145.423,-73.35
VD3: J2.45 LCD1.6 | length 157.3
  Top Layer w0.15: J2.45@-146.973,-73.598 -146.348,-72.973 ; J2.45@-146.973,-73.579 -146.328,-72.934 -142.134,-72.934 -139.9,-70.7 -134.7,-70.7 -131.9,-67.9 -126.9,-67.9 -118.8,-59.8 -118.8,-41.6 -114.1,-36.9 -100.765,-36.9 -100.365,-37.3 -60.2,-37.3 v1(-57.1,-40.4) ; v1@-57.225,-40.4 ccw(c-57.527,-40.4) -57.313,-40.187 ccw(c-57.1,-39.973) v1@-57.1,-40.275 ; v1@-57.188,-52.212 ccw(c-57.402,-51.998) -57.1,-51.998 ccw(c-56.798,-51.998) v1@-57.012,-52.212 ; v1(-57.1,-52.3) LCD1.6@-57.1,-49.7 ; J2.45@-146.973,-73.423 ccw(c-146.973,-73) J2.45@-146.674,-73.299 ; J2.45@-146.973,-73.423 ccw(c-146.973,-73) J2.45@-146.674,-73.299 ; J2.45@-146.973,-73.423 ccw(c-146.973,-73) J2.45@-146.674,-73.299 ; J2.45@-146.973,-73.273 ccw(c-146.973,-72.488) -146.418,-73.043 ; J2.45@-146.973,-73.273 ccw(c-146.973,-72.488) -146.418,-73.043 ; J2.45@-146.973,-73.273 ccw(c-146.973,-72.488) -146.418,-73.043 ; J2.45@-146.923,-73.254 ccw(c-146.923,-72.546) -146.422,-73.047 cw(c-146.923,-72.546) J2.45@-146.923,-73.254 ; J2.45@-146.923,-73.254 ccw(c-146.923,-72.59) -146.453,-73.06 cw(c-146.923,-72.59) J2.45@-146.923,-73.254 ; J2.45@-146.798,-73.598 cw(c-146.375,-73.598) J2.45@-146.674,-73.299 ; J2.45@-146.798,-73.598 cw(c-146.375,-73.598) J2.45@-146.674,-73.299 ; J2.45@-146.798,-73.598 cw(c-146.375,-73.598) J2.45@-146.674,-73.299 ; J2.45@-146.748,-73.579 cw(c-146.253,-73.578) -146.603,-73.228 ccw(c-146.253,-73.578) J2.45@-146.748,-73.579 ; J2.45@-146.748,-73.579 cw(c-146.205,-73.579) -146.589,-73.195 ccw(c-146.205,-73.579) J2.45@-146.748,-73.579 ; J2.45@-146.648,-73.598 cw(c-145.863,-73.598) -146.418,-73.043 ; J2.45@-146.648,-73.598 cw(c-145.863,-73.598) -146.418,-73.043 ; J2.45@-146.648,-73.598 cw(c-145.863,-73.598) -146.418,-73.043 ; J2.45@-146.598,-73.578 cw(c-145.744,-73.576) -146.348,-72.973 ; J2.45@-146.598,-73.579 cw(c-145.692,-73.579) -146.333,-72.939 ccw(c-145.692,-73.579) J2.45@-146.598,-73.579 ; J2.45@-146.598,-73.578 cw(c-145.744,-73.576) -146.348,-72.973 ; -57.399,-40.101 cw(c-57.697,-40.4) v1@-57.275,-40.4 ; -57.399,-40.101 ccw(c-57.1,-39.803) v1@-57.1,-40.225 ; -57.399,-40.101 cw(c-57.697,-40.4) v1@-57.275,-40.4 ; -57.399,-40.101 ccw(c-57.1,-39.803) v1@-57.1,-40.225 ; -57.399,-40.101 cw(c-57.697,-40.4) v1@-57.275,-40.4 ; -57.399,-40.101 ccw(c-57.1,-39.803) v1@-57.1,-40.225 ; -57.399,-40.101 ccw(c-57.1,-39.803) v1@-57.1,-40.225 ; -57.399,-40.101 cw(c-57.697,-40.4) v1@-57.275,-40.4 ; v1@-57.224,-52.176 ccw(c-57.522,-51.878) -57.1,-51.878 ; v1@-57.224,-52.176 ccw(c-57.522,-51.878) -57.1,-51.878 ; v1@-57.224,-52.176 ccw(c-57.522,-51.878) -57.1,-51.878 ; v1@-57.224,-52.176 ccw(c-57.522,-51.878) -57.1,-51.878 ; -57.1,-51.878 ccw(c-56.678,-51.878) v1@-56.976,-52.176 ; -57.1,-51.878 ccw(c-56.678,-51.878) v1@-56.976,-52.176 ; -57.1,-51.878 ccw(c-56.678,-51.878) v1@-56.976,-52.176 ; -57.1,-51.878 ccw(c-56.678,-51.878) v1@-56.976,-52.176
  Bottom Layer w0.15: v1@-57.188,-52.212 ccw(c-57.402,-51.998) -57.1,-51.998 ccw(c-56.798,-51.998) v1@-57.012,-52.212 ; v1@-57.188,-40.488 cw(c-57.402,-40.702) -57.1,-40.702 cw(c-56.798,-40.702) v1@-57.012,-40.488 ; v1(-57.1,-52.3) v1(-57.1,-40.4) ; v1@-57.224,-52.176 ccw(c-57.522,-51.878) -57.1,-51.878 ; v1@-57.224,-52.176 ccw(c-57.522,-51.878) -57.1,-51.878 ; v1@-57.224,-52.176 ccw(c-57.522,-51.878) -57.1,-51.878 ; v1@-57.224,-52.176 ccw(c-57.522,-51.878) -57.1,-51.878 ; v1@-57.224,-40.524 cw(c-57.522,-40.822) -57.1,-40.822 ; v1@-57.224,-40.524 cw(c-57.522,-40.822) -57.1,-40.822 ; v1@-57.224,-40.524 cw(c-57.522,-40.822) -57.1,-40.822 ; v1@-57.224,-40.524 cw(c-57.522,-40.822) -57.1,-40.822 ; -57.1,-51.878 ccw(c-56.678,-51.878) v1@-56.976,-52.176 ; -57.1,-51.878 ccw(c-56.678,-51.878) v1@-56.976,-52.176 ; -57.1,-51.878 ccw(c-56.678,-51.878) v1@-56.976,-52.176 ; -57.1,-51.878 ccw(c-56.678,-51.878) v1@-56.976,-52.176 ; -57.1,-40.822 cw(c-56.678,-40.822) v1@-56.976,-40.524 ; -57.1,-40.822 cw(c-56.678,-40.822) v1@-56.976,-40.524 ; -57.1,-40.822 cw(c-56.678,-40.822) v1@-56.976,-40.524 ; -57.1,-40.822 cw(c-56.678,-40.822) v1@-56.976,-40.524
VD4: J2.48 LCD1.7 | length 132.2
  Top Layer w0.15: J2.48@-145.703,-74.869 -141.969,-74.869 -139.3,-72.2 -134.4,-72.2 -131.3,-69.1 -126,-69.1 -117.6,-60.7 -117.6,-42.2 -113.5,-38.1 -101.2,-38.1 -100.8,-38.5 -91.8,-38.5 -61.4,-38.5 -57.6,-42.3 LCD1.7@-57.6,-49.7 ; J2.48@-145.579,-74.992 cw(c-145.28,-75.291) J2.48@-145.28,-74.869 ; J2.48@-145.579,-74.992 cw(c-145.28,-75.291) J2.48@-145.28,-74.869 ; J2.48@-145.579,-74.992 cw(c-145.28,-75.291) J2.48@-145.28,-74.869 ; J2.48@-145.579,-74.745 ccw(c-145.28,-74.446) J2.48@-145.28,-74.869 ; J2.48@-145.579,-74.745 ccw(c-145.28,-74.446) J2.48@-145.28,-74.869 ; J2.48@-145.579,-74.745 ccw(c-145.28,-74.446) J2.48@-145.28,-74.869 ; J2.48@-145.473,-75.098 cw(c-144.918,-75.653) -144.918,-74.869 ; J2.48@-145.473,-75.098 cw(c-144.918,-75.653) -144.918,-74.869 ; J2.48@-145.473,-75.098 cw(c-144.918,-75.653) -144.918,-74.869 ; J2.48@-145.473,-74.639 ccw(c-144.918,-74.084) -144.918,-74.869 ; J2.48@-145.473,-74.639 ccw(c-144.918,-74.084) -144.918,-74.869 ; J2.48@-145.473,-74.639 ccw(c-144.918,-74.084) -144.918,-74.869 ; J2.48@-145.529,-74.726 ccw(c-145.184,-74.38) -145.184,-74.869 cw(c-145.184,-74.38) J2.48@-145.529,-74.726 ; J2.48@-145.423,-75.079 cw(c-144.915,-75.587) -144.915,-74.869 ccw(c-144.915,-75.587) J2.48@-145.423,-75.079 ; J2.48@-145.423,-74.62 ccw(c-144.822,-74.018) -144.822,-74.869 cw(c-144.822,-74.018) J2.48@-145.423,-74.62
VD5: J2.47 LCD1.8 | length 155.9
  Top Layer w0.15: J2.47@-146.973,-74.869 -146.348,-74.244 ; J2.47@-146.973,-74.849 -146.328,-74.204 -142.004,-74.204 -139.5,-71.7 -134.5,-71.7 -131.5,-68.7 -126.3,-68.7 -118,-60.4 -118,-42 -113.7,-37.7 -101.1,-37.7 -100.7,-38.1 -61,-38.1 v1(-58.1,-41) ; v1@-58.225,-41 ccw(c-58.527,-41) -58.313,-40.787 ccw(c-58.1,-40.573) v1@-58.1,-40.875 ; v1@-58.188,-52.212 ccw(c-58.402,-51.998) -58.1,-51.998 ccw(c-57.798,-51.998) v1@-58.012,-52.212 ; v1(-58.1,-52.3) LCD1.8@-58.1,-49.7 ; J2.47@-146.973,-74.694 ccw(c-146.973,-74.271) J2.47@-146.674,-74.57 ; J2.47@-146.973,-74.694 ccw(c-146.973,-74.271) J2.47@-146.674,-74.57 ; J2.47@-146.973,-74.694 ccw(c-146.973,-74.271) J2.47@-146.674,-74.57 ; J2.47@-146.973,-74.544 ccw(c-146.973,-73.759) -146.418,-74.314 ; J2.47@-146.973,-74.544 ccw(c-146.973,-73.759) -146.418,-74.314 ; J2.47@-146.973,-74.544 ccw(c-146.973,-73.759) -146.418,-74.314 ; J2.47@-146.923,-74.524 ccw(c-146.923,-73.814) -146.42,-74.316 cw(c-146.923,-73.814) J2.47@-146.923,-74.524 ; J2.47@-146.923,-74.524 ccw(c-146.923,-73.86) -146.453,-74.33 cw(c-146.923,-73.86) J2.47@-146.923,-74.524 ; J2.47@-146.798,-74.869 cw(c-146.375,-74.869) J2.47@-146.674,-74.57 ; J2.47@-146.798,-74.869 cw(c-146.375,-74.869) J2.47@-146.674,-74.57 ; J2.47@-146.798,-74.869 cw(c-146.375,-74.869) J2.47@-146.674,-74.57 ; J2.47@-146.748,-74.849 cw(c-146.254,-74.848) -146.603,-74.499 ccw(c-146.254,-74.848) J2.47@-146.748,-74.849 ; J2.47@-146.748,-74.849 cw(c-146.205,-74.849) -146.589,-74.465 ccw(c-146.205,-74.849) J2.47@-146.748,-74.849 ; J2.47@-146.648,-74.869 cw(c-145.863,-74.869) -146.418,-74.314 ; J2.47@-146.648,-74.869 cw(c-145.863,-74.869) -146.418,-74.314 ; J2.47@-146.648,-74.869 cw(c-145.863,-74.869) -146.418,-74.314 ; J2.47@-146.598,-74.849 cw(c-145.744,-74.847) -146.348,-74.244 ; J2.47@-146.598,-74.849 cw(c-145.692,-74.849) -146.333,-74.209 ccw(c-145.692,-74.849) J2.47@-146.598,-74.849 ; J2.47@-146.598,-74.849 cw(c-145.744,-74.847) -146.348,-74.244 ; -58.399,-40.701 cw(c-58.697,-41) v1@-58.275,-41 ; -58.399,-40.701 ccw(c-58.1,-40.403) v1@-58.1,-40.825 ; -58.399,-40.701 cw(c-58.697,-41) v1@-58.275,-41 ; -58.399,-40.701 ccw(c-58.1,-40.403) v1@-58.1,-40.825 ; -58.399,-40.701 cw(c-58.697,-41) v1@-58.275,-41 ; -58.399,-40.701 ccw(c-58.1,-40.403) v1@-58.1,-40.825 ; -58.399,-40.701 ccw(c-58.1,-40.403) v1@-58.1,-40.825 ; -58.399,-40.701 cw(c-58.697,-41) v1@-58.275,-41 ; v1@-58.224,-52.176 ccw(c-58.522,-51.878) -58.1,-51.878 ; v1@-58.224,-52.176 ccw(c-58.522,-51.878) -58.1,-51.878 ; v1@-58.224,-52.176 ccw(c-58.522,-51.878) -58.1,-51.878 ; v1@-58.224,-52.176 ccw(c-58.522,-51.878) -58.1,-51.878 ; -58.1,-51.878 ccw(c-57.678,-51.878) v1@-57.976,-52.176 ; -58.1,-51.878 ccw(c-57.678,-51.878) v1@-57.976,-52.176 ; -58.1,-51.878 ccw(c-57.678,-51.878) v1@-57.976,-52.176 ; -58.1,-51.878 ccw(c-57.678,-51.878) v1@-57.976,-52.176
  Bottom Layer w0.15: v1@-58.188,-52.212 ccw(c-58.402,-51.998) -58.1,-51.998 ccw(c-57.798,-51.998) v1@-58.012,-52.212 ; v1@-58.188,-41.088 cw(c-58.402,-41.302) -58.1,-41.302 cw(c-57.798,-41.302) v1@-58.012,-41.088 ; v1(-58.1,-52.3) v1(-58.1,-41) ; v1@-58.224,-52.176 ccw(c-58.522,-51.878) -58.1,-51.878 ; v1@-58.224,-52.176 ccw(c-58.522,-51.878) -58.1,-51.878 ; v1@-58.224,-52.176 ccw(c-58.522,-51.878) -58.1,-51.878 ; v1@-58.224,-52.176 ccw(c-58.522,-51.878) -58.1,-51.878 ; v1@-58.224,-41.124 cw(c-58.522,-41.422) -58.1,-41.422 ; v1@-58.224,-41.124 cw(c-58.522,-41.422) -58.1,-41.422 ; v1@-58.224,-41.124 cw(c-58.522,-41.422) -58.1,-41.422 ; v1@-58.224,-41.124 cw(c-58.522,-41.422) -58.1,-41.422 ; -58.1,-51.878 ccw(c-57.678,-51.878) v1@-57.976,-52.176 ; -58.1,-51.878 ccw(c-57.678,-51.878) v1@-57.976,-52.176 ; -58.1,-51.878 ccw(c-57.678,-51.878) v1@-57.976,-52.176 ; -58.1,-51.878 ccw(c-57.678,-51.878) v1@-57.976,-52.176 ; -58.1,-41.422 cw(c-57.678,-41.422) v1@-57.976,-41.124 ; -58.1,-41.422 cw(c-57.678,-41.422) v1@-57.976,-41.124 ; -58.1,-41.422 cw(c-57.678,-41.422) v1@-57.976,-41.124 ; -58.1,-41.422 cw(c-57.678,-41.422) v1@-57.976,-41.124
VD6: J2.50 LCD1.9 | length 130.9
  Top Layer w0.15: J2.50@-145.703,-76.139 -141.639,-76.139 -138.7,-73.2 -134.248,-73.2 -130.9,-69.852 -125.352,-69.852 -116.8,-61.3 -116.8,-42.5 -113.175,-38.875 -101.571,-38.875 -101.146,-39.3 -92.1,-39.3 -62.2,-39.3 -58.6,-42.9 LCD1.9@-58.6,-49.7 ; J2.50@-145.579,-76.263 cw(c-145.28,-76.562) J2.50@-145.28,-76.139 ; J2.50@-145.579,-76.263 cw(c-145.28,-76.562) J2.50@-145.28,-76.139 ; J2.50@-145.579,-76.263 cw(c-145.28,-76.562) J2.50@-145.28,-76.139 ; J2.50@-145.579,-76.016 ccw(c-145.28,-75.717) J2.50@-145.28,-76.139 ; J2.50@-145.579,-76.016 ccw(c-145.28,-75.717) J2.50@-145.28,-76.139 ; J2.50@-145.579,-76.016 ccw(c-145.28,-75.717) J2.50@-145.28,-76.139 ; J2.50@-145.473,-76.369 cw(c-144.918,-76.924) -144.918,-76.139 ; J2.50@-145.473,-76.369 cw(c-144.918,-76.924) -144.918,-76.139 ; J2.50@-145.473,-76.369 cw(c-144.918,-76.924) -144.918,-76.139 ; J2.50@-145.473,-75.91 ccw(c-144.918,-75.355) -144.918,-76.139 ; J2.50@-145.473,-75.91 ccw(c-144.918,-75.355) -144.918,-76.139 ; J2.50@-145.473,-75.91 ccw(c-144.918,-75.355) -144.918,-76.139 ; J2.50@-145.529,-75.996 ccw(c-145.182,-75.648) -145.182,-76.139 cw(c-145.182,-75.648) J2.50@-145.529,-75.996 ; J2.50@-145.423,-76.349 cw(c-144.917,-76.855) -144.917,-76.139 ccw(c-144.917,-76.855) J2.50@-145.423,-76.349 ; J2.50@-145.423,-75.89 ccw(c-144.82,-75.286) -144.82,-76.139 cw(c-144.82,-75.286) J2.50@-145.423,-75.89
VD7: J2.49 LCD1.10 | length 154.6
  Top Layer w0.15: J2.49@-146.973,-76.139 -146.348,-75.514 ; J2.49@-146.973,-76.119 -146.328,-75.474 -141.774,-75.474 -139,-72.7 -134.3,-72.7 -131.1,-69.5 -125.7,-69.5 -117.2,-61 -117.2,-42.3 -113.4,-38.5 -101.4,-38.5 -101,-38.9 -61.8,-38.9 v1(-59.1,-41.6) ; v1@-59.225,-41.6 ccw(c-59.527,-41.6) -59.313,-41.387 ccw(c-59.1,-41.173) v1@-59.1,-41.475 ; v1@-59.188,-52.212 ccw(c-59.402,-51.998) -59.1,-51.998 ccw(c-58.798,-51.998) v1@-59.012,-52.212 ; v1(-59.1,-52.3) LCD1.10@-59.1,-49.7 ; J2.49@-146.973,-75.964 ccw(c-146.973,-75.542) J2.49@-146.674,-75.841 ; J2.49@-146.973,-75.964 ccw(c-146.973,-75.542) J2.49@-146.674,-75.841 ; J2.49@-146.973,-75.964 ccw(c-146.973,-75.542) J2.49@-146.674,-75.841 ; J2.49@-146.973,-75.814 ccw(c-146.973,-75.03) -146.418,-75.585 ; J2.49@-146.973,-75.814 ccw(c-146.973,-75.03) -146.418,-75.585 ; J2.49@-146.973,-75.814 ccw(c-146.973,-75.03) -146.418,-75.585 ; J2.49@-146.923,-75.794 ccw(c-146.923,-75.082) -146.419,-75.586 cw(c-146.923,-75.082) J2.49@-146.923,-75.794 ; J2.49@-146.923,-75.794 ccw(c-146.923,-75.13) -146.453,-75.6 cw(c-146.923,-75.13) J2.49@-146.923,-75.794 ; J2.49@-146.798,-76.139 cw(c-146.375,-76.139) J2.49@-146.674,-75.841 ; J2.49@-146.798,-76.139 cw(c-146.375,-76.139) J2.49@-146.674,-75.841 ; J2.49@-146.798,-76.139 cw(c-146.375,-76.139) J2.49@-146.674,-75.841 ; J2.49@-146.748,-76.119 cw(c-146.255,-76.119) -146.603,-75.77 ccw(c-146.255,-76.119) J2.49@-146.748,-76.119 ; J2.49@-146.748,-76.119 cw(c-146.205,-76.119) -146.589,-75.735 ccw(c-146.205,-76.119) J2.49@-146.748,-76.119 ; J2.49@-146.648,-76.139 cw(c-145.863,-76.139) -146.418,-75.585 ; J2.49@-146.648,-76.139 cw(c-145.863,-76.139) -146.418,-75.585 ; J2.49@-146.648,-76.139 cw(c-145.863,-76.139) -146.418,-75.585 ; J2.49@-146.598,-76.119 cw(c-145.744,-76.118) -146.348,-75.515 ; J2.49@-146.598,-76.119 cw(c-145.692,-76.119) -146.333,-75.479 ccw(c-145.692,-76.119) J2.49@-146.598,-76.119 ; J2.49@-146.598,-76.119 cw(c-145.744,-76.118) -146.348,-75.515 ; -59.399,-41.301 cw(c-59.697,-41.6) v1@-59.275,-41.6 ; -59.399,-41.301 ccw(c-59.1,-41.003) v1@-59.1,-41.425 ; -59.399,-41.301 cw(c-59.697,-41.6) v1@-59.275,-41.6 ; -59.399,-41.301 ccw(c-59.1,-41.003) v1@-59.1,-41.425 ; -59.399,-41.301 cw(c-59.697,-41.6) v1@-59.275,-41.6 ; -59.399,-41.301 ccw(c-59.1,-41.003) v1@-59.1,-41.425 ; -59.399,-41.301 ccw(c-59.1,-41.003) v1@-59.1,-41.425 ; -59.399,-41.301 cw(c-59.697,-41.6) v1@-59.275,-41.6 ; v1@-59.224,-52.176 ccw(c-59.522,-51.878) -59.1,-51.878 ; v1@-59.224,-52.176 ccw(c-59.522,-51.878) -59.1,-51.878 ; v1@-59.224,-52.176 ccw(c-59.522,-51.878) -59.1,-51.878 ; v1@-59.224,-52.176 ccw(c-59.522,-51.878) -59.1,-51.878 ; -59.1,-51.878 ccw(c-58.678,-51.878) v1@-58.976,-52.176 ; -59.1,-51.878 ccw(c-58.678,-51.878) v1@-58.976,-52.176 ; -59.1,-51.878 ccw(c-58.678,-51.878) v1@-58.976,-52.176 ; -59.1,-51.878 ccw(c-58.678,-51.878) v1@-58.976,-52.176
  Bottom Layer w0.15: v1@-59.188,-52.212 ccw(c-59.402,-51.998) -59.1,-51.998 ccw(c-58.798,-51.998) v1@-59.012,-52.212 ; v1@-59.188,-41.688 cw(c-59.402,-41.902) -59.1,-41.902 cw(c-58.798,-41.902) v1@-59.012,-41.688 ; v1(-59.1,-52.3) v1(-59.1,-41.6) ; v1@-59.224,-52.176 ccw(c-59.522,-51.878) -59.1,-51.878 ; v1@-59.224,-52.176 ccw(c-59.522,-51.878) -59.1,-51.878 ; v1@-59.224,-52.176 ccw(c-59.522,-51.878) -59.1,-51.878 ; v1@-59.224,-52.176 ccw(c-59.522,-51.878) -59.1,-51.878 ; v1@-59.224,-41.724 cw(c-59.522,-42.022) -59.1,-42.022 ; v1@-59.224,-41.724 cw(c-59.522,-42.022) -59.1,-42.022 ; v1@-59.224,-41.724 cw(c-59.522,-42.022) -59.1,-42.022 ; v1@-59.224,-41.724 cw(c-59.522,-42.022) -59.1,-42.022 ; -59.1,-51.878 ccw(c-58.678,-51.878) v1@-58.976,-52.176 ; -59.1,-51.878 ccw(c-58.678,-51.878) v1@-58.976,-52.176 ; -59.1,-51.878 ccw(c-58.678,-51.878) v1@-58.976,-52.176 ; -59.1,-51.878 ccw(c-58.678,-51.878) v1@-58.976,-52.176 ; -59.1,-42.022 cw(c-58.678,-42.022) v1@-58.976,-41.724 ; -59.1,-42.022 cw(c-58.678,-42.022) v1@-58.976,-41.724 ; -59.1,-42.022 cw(c-58.678,-42.022) v1@-58.976,-41.724 ; -59.1,-42.022 cw(c-58.678,-42.022) v1@-58.976,-41.724